# Altium PCB Tigershark 3D R1.8.PcbDoc (part 2 of 4)
Units mil, origin at the board's own origin, x right, y up, seen from the top; angles counter-clockwise.
Board outline 5500 x 4600 mil, 4 copper layers (Top Layer, Groun Plane, Power Plane, Bottom Layer), stack 61.73 mil thick; 307 components, 237 nets, 994 pads, 1215 vias.
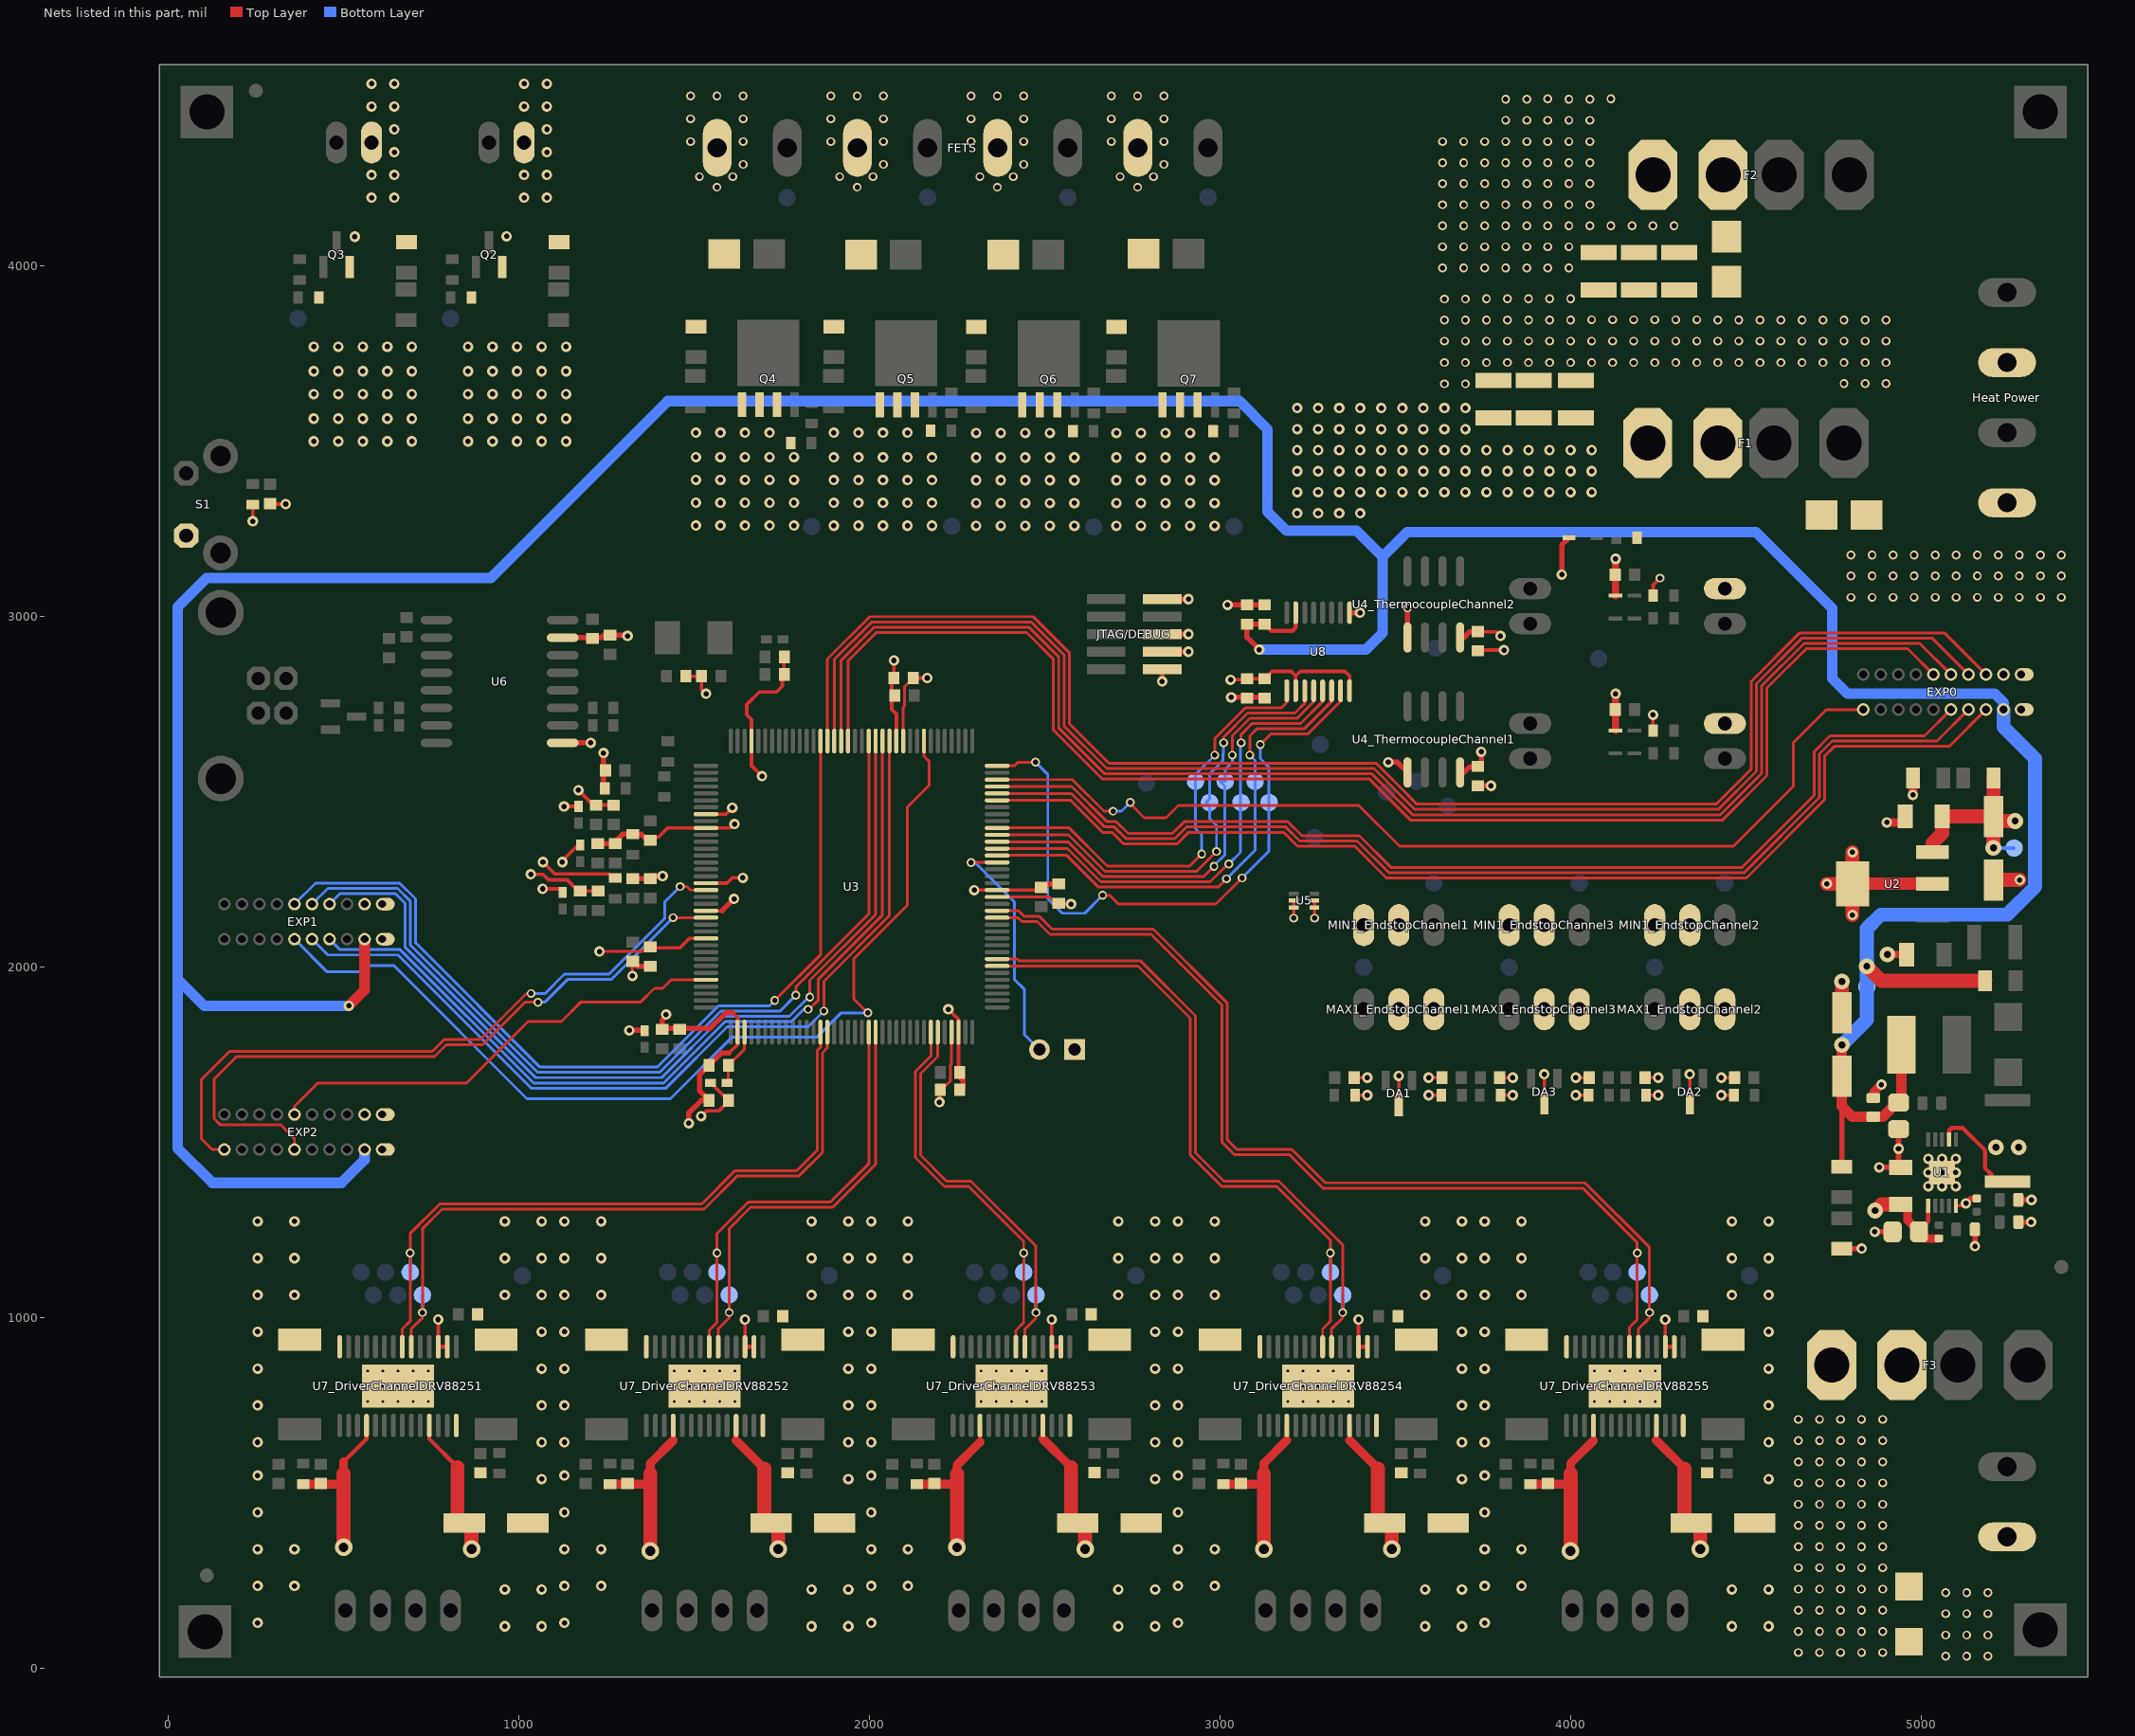
[diagram p4: the nets of this part, all layers, seen from the top]

## Part data
C1_EndstopChannel1 C1_EndstopChannel2 C1_EndstopChannel3 C2_EndstopChannel1 C2_EndstopChannel2 C2_EndstopChannel3 C3 C4 C5 C6 C7 C8 C12 C13 C14 C17 C20 C23 C25 C26 C27 C28 C32 C33 C36 C37 C38 C39 C41 C42 C43 C44 C45 C46 C47 C48 C53 C54 C55 C56 C57 C58 C59 C60 C61 C64 C65 C66_DriverChannelDRV88251 C66_DriverChannelDRV88252 C66_DriverChannelDRV88253 C66_DriverChannelDRV88254 C66_DriverChannelDRV88255 C68_DriverChannelDRV88251 C68_DriverChannelDRV88252 C68_DriverChannelDRV88253 C68_DriverChannelDRV88254 C68_DriverChannelDRV88255 C71_DriverChannelDRV88251 C71_DriverChannelDRV88252 C71_DriverChannelDRV88253 C71_DriverChannelDRV88254 C71_DriverChannelDRV88255 C73 C75_DriverChannelDRV88251 C75_DriverChannelDRV88252 C75_DriverChannelDRV88253 C75_DriverChannelDRV88254 C75_DriverChannelDRV88255: library part "Cap Semi", "Capacitor (Semiconductor SIM Model)"
C9: library part C1206C475K5PACTU, "CAP CER 1206 4.7uF 50V 10% X5R"
C10: library part GRM21BR71H105KA12L, "CAP CER 0805 1uF 50V 10% X7R"
C11 C40: library part C0603C104K5RACTU, "CAP CER 0603 100nF 50V 10% X7R"
C21: library part C0805C106K8PACTU, "CAP CER 0805 10uF 10V 10% X5R"
C22: library part GRM155R60J105KE19D, "CAP CER 0402 1uF 6.3V 10% X5R"
C24 C29: library part "Cap Pol3", "Polarized Capacitor (Surface Mount)"
C30_ThermistorChannel1 C30_ThermistorChannel2 C31_ThermocoupleChannel1 C31_ThermocoupleChannel2 C63: "Capacitor (Semiconductor SIM Model)"
C69_DriverChannelDRV88251 C69_DriverChannelDRV88252 C69_DriverChannelDRV88253 C69_DriverChannelDRV88254 C69_DriverChannelDRV88255: library part "Cap Pol1", "Polarized Capacitor (Radial)"
D1: library part "D Zener", "Zener Diode"
D2: library part SK310A, "DIODE Schottky 3A SMA"
D3_ThermistorChannel1 D3_ThermistorChannel2 D5_ThermistorChannel1 D5_ThermistorChannel2: "High Conductance Fast Diode"
D4 D6 D12 D15 D17 D19: library part "D Schottky", "Schottky Diode"
D7 D9: "Typical RED, GREEN, YELLOW, AMBER GaAs LED"
D8: "DIODE TVS 30V SMA"
D10 D11 D13 D14 D16 D18: "Typical RED GaAs LED"
DA1 DA2 DA3 DA4: "PESDxL2BT TVS Diode Array 2x"
F1 F2 F3 F4: library part "Fuse 1", "Fuse"
FETS: library part con-phoenix-508
"Heat Power": library part con-phoenix-508_4
JTAG/DEBUG: library part "ARM Cortex JTAG-DEBUG Header"
L1: "IND 15uH 3.9A 20%"
M1_DriverChannelDRV88251 M1_DriverChannelDRV88252 M1_DriverChannelDRV88253 M1_DriverChannelDRV88254 M1_DriverChannelDRV88255: library part "Molex 0705430003 Alt", "Molex 4 Pin Clip Connector"
MAX1_EndstopChannel1 MAX1_EndstopChannel2 MAX1_EndstopChannel3 MIN1_EndstopChannel1 MIN1_EndstopChannel2 MIN1_EndstopChannel3: library part "Molex Endstop"
"Motor Power": library part con-phoenix-508_2
P1: library part "Header 2", "Header, 2-Pin"
Q2 Q3 Q4 Q5 Q6 Q7: "N-Channel MOSFET"
R1 R8 R11 R14_ThermistorChannel1 R14_ThermistorChannel2 R19_ThermistorChannel1 R19_ThermistorChannel2 R21 R25: "Resistor"
R2_EndstopChannel1 R2_EndstopChannel2 R2_EndstopChannel3 R3_EndstopChannel1 R3_EndstopChannel2 R3_EndstopChannel3 R4 R5 R6 R13 R15 R16 R18 R20 R22 R23 R30_DriverChannelDRV88251 R30_DriverChannelDRV88252 R30_DriverChannelDRV88253 R30_DriverChannelDRV88254 R30_DriverChannelDRV88255 R31_DriverChannelDRV88251 R31_DriverChannelDRV88252 R31_DriverChannelDRV88253 R31_DriverChannelDRV88254 R31_DriverChannelDRV88255 R32_DriverChannelDRV88251 R32_DriverChannelDRV88252 R32_DriverChannelDRV88253 R32_DriverChannelDRV88254 R32_DriverChannelDRV88255 R33_DriverChannelDRV88251 R33_DriverChannelDRV88252 R33_DriverChannelDRV88253 R33_DriverChannelDRV88254 R33_DriverChannelDRV88255 R45 R46 R47 R52 R55 R56 R58 R59 R60 R62 R63 R64 R66 R67 R68 R70 R71: library part Res3, "Resistor"
R7 R10 R12: library part ERJ-3EKF1002V, "RES 0603 10K 100mW 1%"
R9: library part RL2512FK-070R06L, "RES 0.06 OHM 1W 1% 2512 SMD"
R17: library part CRCW0402200KFKED, "RES 0402 22r 63mW 1%"
S1: library part 1571610-2_1, "SWTCH Momentary Washable"
TP1 TP2 TP3 TP4 TP5 TP6 TP7 TP8 TP9_EndstopChannel1 TP9_EndstopChannel2 TP9_EndstopChannel3 TP10_EndstopChannel1 TP10_EndstopChannel2 TP10_EndstopChannel3 TP11 TP12 TP13 TP14 TP32_DriverChannelDRV88251 TP32_DriverChannelDRV88252 TP32_DriverChannelDRV88253 TP32_DriverChannelDRV88254 TP32_DriverChannelDRV88255 TP33_DriverChannelDRV88251 TP33_DriverChannelDRV88252 TP33_DriverChannelDRV88253 TP33_DriverChannelDRV88254 TP33_DriverChannelDRV88255 TP35_DriverChannelDRV88251 TP35_DriverChannelDRV88252 TP35_DriverChannelDRV88253 TP35_DriverChannelDRV88254 TP35_DriverChannelDRV88255 TP36_DriverChannelDRV88251 TP36_DriverChannelDRV88252 TP36_DriverChannelDRV88253 TP36_DriverChannelDRV88254 TP36_DriverChannelDRV88255 TP37_DriverChannelDRV88251 TP37_DriverChannelDRV88252 TP37_DriverChannelDRV88253 TP37_DriverChannelDRV88254 TP37_DriverChannelDRV88255 TP38 TP39_DriverChannelDRV88251 TP39_DriverChannelDRV88252 TP39_DriverChannelDRV88253 TP39_DriverChannelDRV88254 TP39_DriverChannelDRV88255 TP40_DriverChannelDRV88251 TP40_DriverChannelDRV88252 TP40_DriverChannelDRV88253 TP40_DriverChannelDRV88254 TP40_DriverChannelDRV88255 TP41 TP42 TP43 TP44 TP45 TP46 TP47 TP48 TP49 TP50 TP51 TP52_ThermistorChannel1 TP52_ThermistorChannel2: library part Socket, "Socket"
U1: library part LM25011, "REG BUCK"
U4_ThermocoupleChannel1 U4_ThermocoupleChannel2: "Cold Junction Compensated Thermocouple to Digital Converter, 14 Bits Temperature Resolution, -40 to 125 degC, 8-Pin SOIC (S8+4), Pb-Free"
U6: "USB Opto Isolator"
U7_DriverChannelDRV88251 U7_DriverChannelDRV88252 U7_DriverChannelDRV88253 U7_DriverChannelDRV88254 U7_DriverChannelDRV88255: "DRV8825 Ti Stepper Driver"
U8: library part TXB0106, "TXB0106 - Bidriectional Opendrain/pushpull level shift"
X2: library part XTAL, "Crystal Oscillator"

## Free pads (board coordinates)
  rect 150x150 hole 100: ""(105,105) ""(110,4440) ""(5340,110) ""(5340,4440)

## Via types
v1: diameter 25, hole 15, Top Layer to Bottom Layer, tented both sides, 594 vias
v2: diameter 30, hole 15, Top Layer to Bottom Layer, tented both sides, 518 vias
v3: diameter 19.68, hole 7.87, Top Layer to Bottom Layer, tented both sides, 75 vias
v4: diameter 50, hole 28, Top Layer to Bottom Layer, tented both sides, 10 vias
v5: diameter 45, hole 20, Top Layer to Bottom Layer, tented both sides, 9 vias
v6: diameter 30, hole 15, Top Layer to Bottom Layer, 9 vias

## Nets (pads, with @x,y where several pads share a name; then routed paths per layer and width w, separated by ;. In a path a pad name is that pad's centre, name@x,y a point inside that pad or via, vN(x,y) a via of type N, cw(c..) or ccw(c..) an arc to the next point about the centre after c; other vN are vias at no path point)
3.3VCC: C7.2 C25.2 C26.1 C29.1 C31_ThermocoupleChannel1.2 C31_ThermocoupleChannel2.2 C45.2 C46.2 C47.2 C48.2 C64.2 EXP0.12 EXP1.12 EXP2.12 FB5.1 FB6.1 FB7.1 FB8.1 FB9.1 JTAG/DEBUG.1 MAX1_EndstopChannel1.3 MAX1_EndstopChannel2.3 MAX1_EndstopChannel3.3 MIN1_EndstopChannel1.3 MIN1_EndstopChannel2.3 MIN1_EndstopChannel3.3 P1.1 R2_EndstopChannel1.1 R2_EndstopChannel2.1 R2_EndstopChannel3.1 R3_EndstopChannel1.1 R3_EndstopChannel2.1 R3_EndstopChannel3.1 R6.1 R11.2 R19_ThermistorChannel1.2 R19_ThermistorChannel2.2 R21.2 TP3.1 U2.3 U3.11 U3.62 U3.105 U3.125 U4_ThermocoupleChannel1.4 U4_ThermocoupleChannel2.4 U5.1 U5.2 U5.5 U5.6 U7_DriverChannelDRV88251.16 U7_DriverChannelDRV88251.17 U7_DriverChannelDRV88252.16 U7_DriverChannelDRV88252.17 U7_DriverChannelDRV88253.16 U7_DriverChannelDRV88253.17 U7_DriverChannelDRV88254.16 U7_DriverChannelDRV88254.17 U7_DriverChannelDRV88255.16 U7_DriverChannelDRV88255.17 U8.2 U8.8 | length 3817.7
  Top Layer w8: v2(1230,2045) 1348.38,2045 1349.19,2044.19 1362.35,2057.35 C48.2@1373.9,2045.81 ; FB9.1@1546.38,1670 FB9.1@1547.56,1670 ; C64.2@1597.56,1617.56 C64.2@1597.56,1620 ; U3.11@2096.54,2645.35 2096.54,2741.54 2100,2745 2100,2800 C47.2@2125,2825 ; C45.2@2210,1655 2231.55,1676.55 2231.55,1676.99 2230.81,1677.73 2230.81,1722.27 2234.33,1725.79 U3.105@2234.33,1814.65 ; U3.125@2364.25,2200.47 2513.43,2200.47 C46.2@2523.9,2190 ; JTAG/DEBUG.1@2834.92,2850 JTAG/DEBUG.1@2835,2849.92
  Top Layer w10: v2(241,3272) R21.2@241,3319.47 ; U7_DriverChannelDRV88251.17@770,917.36 v2(770,995) ; v2(1067.9,2223.62) FB5.1@1120.12,2223.62 ; v2(1068.9,2300) 1102.9,2266 1257.43,2266 R6.1@1268.9,2254.53 ; v2(1123.9,2300) 1123.9,2303.62 FB7.1@1168.9,2348.62 ; v2(1128.9,2458.62) FB8.1@1168.9,2458.62 ; C48.2@1373.9,2047.56 1373.9,2050 1379.46,2055.56 1459.6,2055.56 1486.4,2082.36 U3.62@1533.54,2082.36 ; v2(1520,1575) 1535,1590 1570,1590 C64.2@1597.56,1617.56 ; FB9.1@1547.56,1670 C64.2@1597.56,1620 ; U7_DriverChannelDRV88252.17@1645,917.36 v2(1645,995) ; C47.2@2125,2825 v2(2165,2825) ; v2(2200,1615) 2200,1645 C45.2@2210,1655 ; U7_DriverChannelDRV88253.17@2520,917.36 v2(2520,995) ; C46.2@2542.15,2184.19 2546.34,2180 v2(2575,2180) ; v2(3030,2820) C25.2@3067.44,2820 ; C25.2@3077,2822.56 C26.1@3127,2822.56 3148.44,2844 3203,2844 3216.02,2830.98 ; v1(3210,2140) 3210.47,2140.47 U5.6@3210.47,2170.32 U5.5@3210.47,2190 ; U8.2@3216.02,2788.78 3216.02,2830.98 ; U5.2@3269.53,2190 3270,2189.53 v1(3270,2140) ; U8.8@3369.57,2788.78 3369.57,2830.43 3356,2844 3229.05,2844 3216.02,2830.98 ; R3_EndstopChannel1.1@3385,1635 v2(3420,1635) ; U7_DriverChannelDRV88254.17@3395,917.36 v2(3395,995) ; v2(3595,1635) R2_EndstopChannel1.1@3630.95,1635 ; C31_ThermocoupleChannel2.2@3750,2957.05 3787.95,2957.05 v2(3800,2945) ; R3_EndstopChannel3.1@3800,1635 v2(3835,1635) ; v2(4015,1635) R2_EndstopChannel3.1@4050.95,1635 ; R3_EndstopChannel2.1@4215,1635 v2(4250,1635) ; v2(4235,2720) 4235,2675.47 R19_ThermistorChannel1.2@4235.47,2675 ; R19_ThermistorChannel2.2@4235.47,3060 4235.47,3090.47 v1(4255,3110) ; U7_DriverChannelDRV88255.17@4270,917.36 v2(4270,995) ; v2(4430,1635) R2_EndstopChannel2.1@4465.95,1635
  Top Layer w12: U7_DriverChannelDRV88251.17@770.16,917.2 U7_DriverChannelDRV88251.16@795.75,917.2 ; U7_DriverChannelDRV88252.17@1645.16,917.2 U7_DriverChannelDRV88252.16@1670.75,917.2 ; U7_DriverChannelDRV88253.17@2520.16,917.2 U7_DriverChannelDRV88253.16@2545.75,917.2 ; U7_DriverChannelDRV88254.17@3395.16,917.2 U7_DriverChannelDRV88254.16@3420.75,917.2 ; U7_DriverChannelDRV88255.17@4270.16,917.2 U7_DriverChannelDRV88255.16@4295.75,917.2
  Top Layer w15: v2(1315,1820) 1357.52,1820 FB6.1@1358.9,1818.62 ; v2(2835,2815) JTAG/DEBUG.1@2835,2849.92 ; U4_ThermocoupleChannel1.4@3685,2555.51 3696.02,2555.51 3712.56,2572.05 3745,2572.05 v2(3745,2614.49) ; U4_ThermocoupleChannel2.4@3685,2940.51 3696.02,2940.51 3712.56,2957.05 C31_ThermocoupleChannel2.2@3745,2957.05
  Top Layer w40: U2.3@5032.17,2328.55 5032.17,2354.17 5060.15,2382.15 C7.2@5060.15,2430 5206.55,2430 5206.55,2539.76 R11.2@5206.31,2540 ; v5(5206,2340) C29.1@5206,2428.55 ; C29.1@5219.55,2417 v5(5268,2417)
  Bottom Layer w10: v5(5206,2340) TP3.1@5265,2340
+5VCC: C11.1 C17.1 C20.1 C21.1 C24.1 EXP0.9 EXP1.9 EXP2.9 L1.2 R7.2 R8.2 R10.1 R25.1 TP1.1 U8.15 | length 12482.1
  Top Layer w12: C17.1@3127,2978.44 3146.44,2959 3206,2959 3216.02,2969.02 U8.15@3216.02,3011.22
  Top Layer w15: v2(3112,2906) 3077,2941 C20.1@3077,2978.44 C17.1@3127,2978.44 ; R8.2@4773.57,1430.62 4773.57,1508.31 4773.57,1603.31 ; R7.2@5153.35,1252.32 5153.57,1252.09 v2(5153.57,1204.31) ; R10.1@5277.34,1336.31 v2(5314.57,1336.31)
  Top Layer w30: v2(515,1890) 560,1935 EXP1.9@560,2080 ; v5(4773.57,1778.31) C24.1@4773.57,1688.76 4773.57,1603.31 4803.35,1573.54 C11.1@4863.57,1573.54 4891.31,1573.54 4931.48,1613.72 C21.1@4935.57,1613.72 ; C21.1@4943.83,1621.98 L1.2@4943.83,1779.31
  Top Layer w40: v5(4845,2003) 4887,1961 R25.1@5182.69,1961
  Bottom Layer w30: v2(515,1890) 102,1890 27,1965 ; EXP2.9@560,1480 560,1450 495,1385 125,1385 27,1483 27,1965 ; v2(3112,2906) 3416,2906 3464,2954 3464,3170.41 ; EXP0.9@5235,2735 5235,2755 5210,2780 4790,2780 4746,2824 4746,3024 4529,3241 3534.59,3241 3464,3170.41 ; 27,1965 27,3027.82 109.18,3110 920,3110 1425,3615 3055,3615 3135,3535 3135,3300 3190,3245 3389.41,3245 3464,3170.41
  Bottom Layer w40: v5(4773.57,1778.31) 4845,1849.74 4845,2110 4885,2150 5245,2150 5325,2230 5325,2595 5235,2685 EXP0.9@5235,2735
+12VCC1: C9.1 C10.1 C66_DriverChannelDRV88251.1 C66_DriverChannelDRV88252.1 C66_DriverChannelDRV88253.1 C66_DriverChannelDRV88254.1 C66_DriverChannelDRV88255.1 C69_DriverChannelDRV88251.1 C69_DriverChannelDRV88252.1 C69_DriverChannelDRV88253.1 C69_DriverChannelDRV88254.1 C69_DriverChannelDRV88255.1 D8.C F3.2 R17.2 R30_DriverChannelDRV88251.1 R30_DriverChannelDRV88252.1 R30_DriverChannelDRV88253.1 R30_DriverChannelDRV88254.1 R30_DriverChannelDRV88255.1 U1.1 U7_DriverChannelDRV88251.4 U7_DriverChannelDRV88251.11 U7_DriverChannelDRV88252.4 U7_DriverChannelDRV88252.11 U7_DriverChannelDRV88253.4 U7_DriverChannelDRV88253.11 U7_DriverChannelDRV88254.4 U7_DriverChannelDRV88254.11 U7_DriverChannelDRV88255.4 U7_DriverChannelDRV88255.11 | length 4662.8
  Top Layer w12: 500,589 565.43,654.43 U7_DriverChannelDRV88251.4@565.43,692.8 ; U7_DriverChannelDRV88251.11@744.57,692.8 744.57,654.43 825,574 ; 1440.43,650.43 U7_DriverChannelDRV88252.4@1440.43,692.8 ; 1619.57,650.43 U7_DriverChannelDRV88252.11@1619.57,692.8 ; 2315.43,645.43 U7_DriverChannelDRV88253.4@2315.43,692.8 ; 2494.57,654.43 U7_DriverChannelDRV88253.11@2494.57,692.8 ; 3190.43,650.43 U7_DriverChannelDRV88254.4@3190.43,692.8 ; 3369.57,650.43 U7_DriverChannelDRV88254.11@3369.57,692.8 ; 4065.43,650.43 U7_DriverChannelDRV88255.4@4065.43,692.8 ; 4244.57,650.43 U7_DriverChannelDRV88255.11@4244.57,692.8 ; C10.1@5011.05,1266.68 5020.2,1275.83 U1.1@5020.2,1319.83
  Top Layer w24: C9.1@4961.57,1303.15 4961.57,1277.72 C10.1@4993.98,1245.31 ; C10.1@5012.98,1226.31 R17.2@5050.57,1226.31
  Top Layer w25: R30_DriverChannelDRV88251.1@385,525.47 500,525.47 ; 500,555 500,589 ; R30_DriverChannelDRV88252.1@1260,525.47 1375,525.47 ; 1375,555 1375,585 1440.43,650.43 ; 1619.57,650.43 1700,570 ; R30_DriverChannelDRV88253.1@2135,525.47 2250,525.47 ; 2250,555 2250,580 2315.43,645.43 ; 2494.57,654.43 2575,574 ; R30_DriverChannelDRV88254.1@3010,525.47 3125,525.47 ; 3125,555 3125,585 3190.43,650.43 ; 3369.57,650.43 3450,570 ; R30_DriverChannelDRV88255.1@3885,525.47 4000,525.47 ; 4000,555 4000,585 4065.43,650.43 ; 4244.57,650.43 4325,570
  Top Layer w40: v4(500,345) 500,555 ; C69_DriverChannelDRV88251.1@825,415.55 825,574 ; v4(865,340) C69_DriverChannelDRV88251.1@865,415 ; v4(1375,335) 1375,555 ; C69_DriverChannelDRV88252.1@1700,415.55 1700,570 ; v4(1740,340) C69_DriverChannelDRV88252.1@1740,420 ; v4(2250,345) 2250,555 ; C69_DriverChannelDRV88253.1@2575,415.55 2575,574 ; v4(2615,340) C69_DriverChannelDRV88253.1@2615,420 ; v4(3125,340) 3125,555 ; C69_DriverChannelDRV88254.1@3450,415.55 3450,570 ; v4(3490,340) C69_DriverChannelDRV88254.1@3490,420 ; v4(4000,335) 4000,555 ; C69_DriverChannelDRV88255.1@4325,415.55 4325,570 ; v4(4370,340) C69_DriverChannelDRV88255.1@4370,415 ; v5(4869,1306) 4886.17,1323.17 C9.1@4941.57,1323.17
  other v1: 4650,45 4710,45 4770,45 4830,45 4890,45 4650,105 4710,105 4770,105 4830,105 4890,105 4650,166 4710,166 4770,166 4830,166 4890,166 4650,226 4710,226 4770,226 4830,226 4890,226 4650,287 4710,287 4770,287 4830,287 4890,287 4650,347 4710,347 4770,347 4830,347 4890,347 4650,408 4710,408 4770,408 4830,408 4890,408 4650,468 4710,468 4770,468 4830,468 4890,468 4650,529 4710,529 4770,529 4830,529 4890,529 4650,589 4710,589 4770,589 4830,589 4890,589 4650,650 4710,650 4770,650 4830,650 4890,650 4650,710 4710,710 4770,710 4830,710 4890,710
+12VCC2: C8.2 C12.2 C14.2 D6.2 D12.2 D15.2 D17.2 F1.2 FAN-1.1 FAN-2.1 FETS.1 FETS.3 FETS.5 R1.2 R13.1 R47.1 R56.2 R60.2 R64.2
  other v1: 1565,4225 1965,4225 2365,4225 1515,4255 1610,4255 1915,4255 2010,4255 2315,4255 2410,4255 1640,4290 2040,4290 2440,4290 1490,4355 1640,4355 1890,4355 2040,4355 2290,4355 2440,4355 1490,4420 1640,4420 1890,4420 2040,4420 2290,4420 2440,4420 1490,4485 1565,4485 1640,4485 1890,4485 1965,4485 2040,4485 2290,4485 2365,4485 2440,4485
  other v2: 3220,3295 3280,3295 3340,3295 3400,3295 3220,3355 3280,3355 3340,3355 3400,3355 3460,3355 3520,3355 3580,3355 3640,3355 3700,3355 3760,3355 3820,3355 3880,3355 3940,3355 4000,3355 4060,3355 3220,3415 3280,3415 3340,3415 3400,3415 3460,3415 3520,3415 3580,3415 3640,3415 3700,3415 3760,3415 3820,3415 3880,3415 3940,3415 4000,3415 4060,3415 3220,3475 3280,3475 3340,3475 3400,3475 3460,3475 3520,3475 3580,3475 3640,3475 3700,3475 3760,3475 3820,3475 3880,3475 3940,3475 4000,3475 4060,3475 3220,3535 3280,3535 3340,3535 3400,3535 3460,3535 3520,3535 3580,3535 3640,3535 3700,3535 3220,3595 3280,3595 3340,3595 3400,3595 3460,3595 3520,3595 3580,3595 3640,3595 3700,3595 580,4195 645,4195 1015,4195 1080,4195 580,4260 645,4260 1015,4260 1080,4260 645,4325 1080,4325 645,4390 1080,4390 580,4455 645,4455 1015,4455 1080,4455 580,4520 645,4520 1015,4520 1080,4520
+12VCC3: C3.2 C5.2 C6.2 D4.2 D19.2 F2.2 FETS.7 R68.2
  other v1: 3635,3995 3695,3995 3755,3995 3815,3995 3875,3995 3935,3995 3995,3995 3635,4055 3695,4055 3755,4055 3815,4055 3875,4055 3935,4055 3995,4055 3635,4115 3695,4115 3755,4115 3815,4115 3875,4115 3935,4115 3995,4115 4055,4115 4115,4115 4175,4115 4235,4115 4295,4115 3635,4175 3695,4175 3755,4175 3815,4175 3875,4175 3935,4175 3995,4175 4055,4175 2765,4225 3635,4235 3695,4235 3755,4235 3815,4235 3875,4235 3935,4235 3995,4235 4055,4235 2715,4255 2810,4255 2840,4290 3635,4295 3695,4295 3755,4295 3815,4295 3875,4295 3935,4295 3995,4295 4055,4295 2690,4355 2840,4355 3635,4355 3695,4355 3755,4355 3815,4355 3875,4355 3935,4355 3995,4355 4055,4355 3815,4416 3875,4416 3935,4416 3995,4416 4055,4416 2690,4420 2840,4420 3815,4476 3875,4476 3995,4476 4055,4476 3935,4477 4115,4477 2690,4485 2765,4485 2840,4485
AN_EXP0: EXP1.7 U3.14 | length 2477.1
  Top Layer w8: v1(1825,1880) 1828.23,1880 1853.5,1905.27 1853.5,1964.71 2036,2147.21 2036,2643.87 U3.14@2037.48,2645.35
  Bottom Layer w8: EXP1.7@460,2080 490,2050 661.51,2050 1041.51,1670 1413.49,1670 1588.49,1845 1777.98,1845 1812.98,1880 v1(1825,1880)
AN_EXP1: EXP1.14 U3.15 | length 2576.5
  Top Layer w8: v1(1830,1915) 1830,1962.43 2017.8,2150.22 U3.15@2017.8,2645.35
  Bottom Layer w8: EXP1.14@460,2180 490,2210 647.72,2210 675,2182.72 675,2057.72 1047.72,1685 1407.28,1685 1582.28,1860 1771.77,1860 1826.77,1915 v1(1830,1915)
AVREF: C65.2 FB9.2 U3.75 | length 165.4
  Top Layer w8: FB9.2@1593.62,1670 1597.56,1673.94 C65.2@1597.56,1720 1643.78,1766.22 U3.75@1643.78,1814.65
BED_PWM: TP38.1 U3.144 U8.7 | length 1884.6
  Top Layer w8: U3.144@2364.25,2574.49 2413.39,2574.49 2423.9,2585 v1(2473.9,2585) ; v1(2665,2205) 2685,2205 2710,2180 2988.14,2180 v1(3062.78,2254.64) ; v1(3115,2635) 3145,2665 3250,2665 3343.98,2758.98 U8.7@3343.98,2788.78
  Bottom Layer w8: v1(2473.9,2585) 2508.9,2550 2508.9,2195 2549.9,2154 2614,2154 v1(2665,2205) ; v1(3062.78,2254.64) 3140,2331.86 3140,2570 3115,2595 v1(3115,2635)
DIR1: TP39_DriverChannelDRV88251.1 U3.87 U7_DriverChannelDRV88251.20 | length 1964.8
  Top Layer w8: U7_DriverChannelDRV88251.20@693.39,917.2 693.39,968.39 725,1000 ; v1(725,1015) 725,1253.93 781.07,1310 1528.35,1310 1623.35,1405 1799.3,1405 1865.94,1471.64 1865.94,1755.94 1880,1770 U3.87@1880,1814.65
  Bottom Layer w8: v1(725,1015) TP39_DriverChannelDRV88251.1@725,1065
DIR2: TP39_DriverChannelDRV88252.1 U3.94 U7_DriverChannelDRV88252.20 | length 1270.6
  Top Layer w8: U7_DriverChannelDRV88252.20@1568.39,917.2 1568.39,968.17 1600,999.79 v1(1600,1015) 1600,1253.93 1661.07,1315 1895,1315 2017.8,1437.8 U3.94@2017.8,1814.65
  Bottom Layer w8: v1(1600,1015) TP39_DriverChannelDRV88252.1@1600,1065
DIR3: TP39_DriverChannelDRV88253.1 U3.103 U7_DriverChannelDRV88253.20 | length 1158.3
  Top Layer w8: U3.103@2194.96,1814.65 2194.96,1744.96 2146.22,1696.22 2146.22,1463.78 2220,1390 2289.4,1390 2475,1204.4 v1(2475,1015) 2475,998.79 2446.21,970 2445,970 2443.39,968.39 U7_DriverChannelDRV88253.20@2443.39,917.2
  Bottom Layer w8: v1(2475,1015) TP39_DriverChannelDRV88253.1@2475,1065
DIR4: TP39_DriverChannelDRV88254.1 U3.116 U7_DriverChannelDRV88254.20 | length 1905.6
  Top Layer w8: U3.116@2364.25,2023.31 2421.69,2023.31 2426.38,2018.62 2772.44,2018.62 2930,1861.07 2930,1471.07 3011.07,1390 3167.72,1390 3350,1207.72 v1(3350,1015) 3350,1000 3318.39,968.39 U7_DriverChannelDRV88254.20@3318.39,917.2
  Bottom Layer w8: v1(3350,1015) TP39_DriverChannelDRV88254.1@3350,1065
DIR5: TP39_DriverChannelDRV88255.1 U3.123 U7_DriverChannelDRV88255.20 | length 2833.8
  Top Layer w8: U3.123@2364.25,2161.1 2425.11,2161.1 2441.21,2145 2484.84,2145 2521.21,2108.62 2809.72,2108.62 3020,1898.35 3020,1508.35 3048.35,1480 3205,1480 3300,1385 4041.07,1385 4225,1201.07 v1(4225,1015) 4225,1000 4193.39,968.39 U7_DriverChannelDRV88255.20@4193.39,917.2
  Bottom Layer w8: v1(4225,1015) TP39_DriverChannelDRV88255.1@4225,1065
DIR_EXP1: EXP1.6 U3.13 | length 2575
  Top Layer w8: v1(1870,1875) 1870,1960 2057.17,2147.17 U3.13@2057.17,2645.35
  Bottom Layer w8: EXP1.6@410,2080 455,2035 655.29,2035 1035.29,1655 1419.71,1655 1594.71,1830 1825,1830 v1(1870,1875)
DIR_EXP2: EXP1.15 U3.16 | length 2592
  Top Layer w8: v1(1790,1920) 1790,1943.64 1998.11,2151.75 U3.16@1998.11,2645.35
  Bottom Layer w8: EXP1.15@410,2180 455,2225 653.93,2225 690,2188.93 690,2063.93 1053.93,1700 1401.07,1700 1576.07,1875 1745,1875 v1(1790,1920)
EN1: TP32_DriverChannelDRV88251.1 U3.86 U7_DriverChannelDRV88251.21 | length 1987.2
  Top Layer w8: U7_DriverChannelDRV88251.21@667.8,917.2 667.8,967.8 690,990 v1(690,1185) 690,1240.15 774.85,1325 1522.13,1325 1617.13,1420 1793.09,1420 1850.94,1477.86 1850.94,1762.16 1860.32,1771.53 U3.86@1860.32,1814.65
  Bottom Layer w8: TP32_DriverChannelDRV88251.1@690,1130 v1(690,1185)
EN2: TP32_DriverChannelDRV88252.1 U3.93 U7_DriverChannelDRV88252.21 | length 1278.1
  Top Layer w8: U7_DriverChannelDRV88252.21@1542.8,917.2 1542.8,963.8 1565,986 v1(1565,1185) 1565,1240.15 1654.85,1330 1888.79,1330 1998.11,1439.32 U3.93@1998.11,1814.65
  Bottom Layer w8: TP32_DriverChannelDRV88252.1@1565,1130 v1(1565,1185)
EN3: TP32_DriverChannelDRV88253.1 U3.102 U7_DriverChannelDRV88253.21 | length 1148.4
  Top Layer w8: U3.102@2175.28,1814.65 2175.28,1746.49 2131.22,1702.43 2131.22,1457.57 2213.79,1375 2283.18,1375 2440,1218.18 v1(2440,1185) 2440,986.21 2417.8,964.01 U7_DriverChannelDRV88253.21@2417.8,917.2
  Bottom Layer w8: TP32_DriverChannelDRV88253.1@2440,1130 v1(2440,1185)
EN4: TP32_DriverChannelDRV88254.1 U3.115 U7_DriverChannelDRV88254.21 | length 1871.7
  Top Layer w8: U3.115@2364.25,2003.62 2766.23,2003.62 2915,1854.85 2915,1464.85 3004.85,1375 3161.51,1375 3315,1221.51 v1(3315,1185) 3315,990 3292.8,967.8 U7_DriverChannelDRV88254.21@3292.8,917.2
  Bottom Layer w8: TP32_DriverChannelDRV88254.1@3315,1130 v1(3315,1185)
EN5: TP32_DriverChannelDRV88255.1 U3.122 U7_DriverChannelDRV88255.21 | length 2799.8
  Top Layer w8: U3.122@2364.25,2141.42 2423.58,2141.42 2435,2130 2478.62,2130 2515,2093.62 2803.51,2093.62 3005,1892.13 3005,1502.13 3042.13,1465 3198.79,1465 3293.79,1370 4034.85,1370 4190,1214.85 v1(4190,1185) 4190,995 4167.8,972.8 U7_DriverChannelDRV88255.21@4167.8,917.2
  Bottom Layer w8: TP32_DriverChannelDRV88255.1@4190,1130 v1(4190,1185)
EN_EXP1: EXP1.5 U3.8 | length 2826.6
  Top Layer w8: v1(1995,1870) 1955.61,1909.39 1955.61,2024.39 2107.75,2176.54 2107.75,2455.94 2169.9,2518.08 2169.9,2587.68 2155.59,2601.98 U3.8@2155.59,2645.35
  Bottom Layer w8: EXP1.5@360,2080 453.5,1986.5 552.71,1986.5 571.21,2005 642.87,2005 1022.87,1625 1432.13,1625 1607.13,1800 1849.45,1800 1919.45,1870 v1(1995,1870)
EN_EXP2: EXP1.16 U3.23 | length 2558.6
  Top Layer w8: v1(1730,1905) 1860.32,2035.32 U3.23@1860.32,2645.35
  Bottom Layer w8: EXP1.16@360,2180 420,2240 660.15,2240 705,2195.15 705,2070.15 1060.15,1715 1394.85,1715 1569.85,1890 1715,1890 v1(1730,1905)
ERASE: P1.2 U3.130 | length 695.4
  Top Layer w8: v1(2290,2298.9) U3.130@2364.25,2298.9
  Bottom Layer w8: v1(2290,2298.9) 2301.1,2298.9 2413.9,2186.1 2413.9,1965 2441.4,1937.5 2441.4,1808.6 P1.2@2485,1765
EXP_CS: EXP0.1 U3.142 | length 2835.7
  Top Layer w8: U3.142@2364.25,2535.12 2578.67,2535.12 2668.79,2445 v1(2695,2445) ; v1(2743.9,2470) 2743.9,2466.77 2784.16,2426.5 2845.95,2426.5 2880.95,2461.5 3395.55,2461.5 3512.05,2345 4464.71,2345 4635,2515.29 4635,2640 4730,2735 EXP0.1@4835,2735
  Bottom Layer w8: v1(2695,2445) 2718.9,2445 v1(2743.9,2470)
EXP_CS2: EXP2.1 U3.55 | length 1945.6
  Top Layer w8: EXP2.1@160,1480 125,1480 95,1510 95,1680 175,1760 753.23,1760 786.98,1793.75 890.26,1793.75 1021.51,1925 v1(1035,1925) ; v1(1460,2230) 1480,2230 1489.84,2220.16 U3.55@1533.54,2220.16
  Bottom Layer w8: v1(1035,1925) 1075,1925 1130,1980 1257.37,1980 1416.5,2139.13 1416.5,2186.5 v1(1460,2230)
EXP_INTERRUP1: EXP0.16 U3.19 | length 4078.2
  Top Layer w8: U3.19@1939.06,2645.35 1939.06,2874.35 2019.71,2955 2448.64,2955 2525,2878.64 2525,2676.36 2664.86,2536.5 3426.85,2536.5 3467.19,2496.16 3467.19,2495.93 3543.12,2420 4433.64,2420 4560,2546.36 4560,2796.36 4672.64,2909 4961,2909 EXP0.16@5035,2835
EXP_INTERRUP2: EXP0.15 U3.20 | length 4161.2
  Top Layer w8: U3.20@1919.37,2645.35 1919.37,2875.88 2013.49,2970 2454.85,2970 2540,2884.85 2540,2682.57 2671.07,2551.5 3433.06,2551.5 3482.19,2502.37 3482.19,2502.14 3549.33,2435 4427.43,2435 4545,2552.57 4545,2802.57 4666.43,2924 4996,2924 EXP0.15@5085,2835
EXP_SYNC: EXP0.6 U3.141 | length 3103.4
  Top Layer w8: U3.141@2364.25,2515.43 2577.14,2515.43 2677.57,2415 2704.45,2415 2737.95,2381.5 2864.59,2381.5 2898.09,2415 3193.79,2415 3233.79,2375 3397.2,2375 3487.2,2285 4489.56,2285 4695,2490.44 4695,2615.15 4739.85,2660 5010,2660 EXP0.6@5085,2735
FET_PWM1: TP43.1 U3.135 U8.1 | length 1283.7
  Top Layer w8: U3.135@2364.25,2397.32 2569.44,2397.32 2678.27,2288.5 2913.14,2288.5 v1(2947.57,2322.93) ; v1(2985,2605) 2985,2652.43 3072.57,2740 3175,2740 3190.43,2755.43 U8.1@3190.43,2788.78
  Bottom Layer w8: v1(2947.57,2322.93) 2947.57,2377.43 2930,2395 2930,2550 v1(2985,2605)
FET_PWM2: TP44.1 U3.134 U8.3 | length 1359.2
  Top Layer w8: U3.134@2364.25,2377.64 2567.91,2377.64 2672.05,2273.5 2933.5,2273.5 v1(2990,2330) ; v1(3010,2640) 3010,2656.21 3078.79,2725 3213.79,2725 3241.61,2752.83 U8.3@3241.61,2788.78
  Bottom Layer w8: v1(2990,2330) 2990,2405 2970,2425 2970,2460 2960,2470 2970,2480 2970,2550.91 3008.5,2589.41 3008.5,2608.5 3010,2610 v1(3010,2640)
FET_PWM3: TP45.1 U3.133 U8.4 | length 1384.9
  Top Layer w8: U3.133@2364.25,2357.95 2566.39,2357.95 2665.84,2258.5 2953.86,2258.5 v1(2982.93,2287.57) ; v1(3035,2605) 3035,2660 3085,2710 3220,2710 3267.2,2757.2 U8.4@3267.2,2788.78
  Bottom Layer w8: v1(2982.93,2287.57) 2982.93,2289.69 3013.5,2320.27 3013.5,2516.5 TP45.1@3000,2530 ; TP45.1@3005,2530 TP45.1@3015,2530 3015,2565 3035,2585 v1(3035,2605)
FET_PWM4: TP46.1 U3.132 U8.5 | length 1407.8
  Top Layer w8: U3.132@2364.25,2338.27 2564.86,2338.27 2659.63,2243.5 2972.09,2243.5 3023.23,2294.64 v1(3025.36,2294.64) ; v1(3060,2640) 3060,2663.79 3091.21,2695 3230,2695 3292.8,2757.8 U8.5@3292.8,2788.78
  Bottom Layer w8: v1(3025.36,2294.64) 3058.5,2327.79 3058.5,2638.5 v1(3060,2640)
FET_PWM5: TP47.1 U3.131 U8.6 | length 1455.5
  Top Layer w8: U3.131@2364.25,2318.58 2364.25,2320 2561.91,2320 2653.41,2228.5 2994.57,2228.5 v1(3018.28,2252.22) ; v1(3085,2605) 3085,2660 3105,2680 3240,2680 3318.39,2758.39 U8.6@3318.39,2788.78
  Bottom Layer w8: v1(3018.28,2252.22) 3100,2333.93 3100,2590 v1(3085,2605)
GND: "Heat Power.2" "Heat Power.4" "Motor Power.2" C1_EndstopChannel1.2 C1_EndstopChannel2.2 C1_EndstopChannel3.2 C2_EndstopChannel1.2 C2_EndstopChannel2.2 C2_EndstopChannel3.2 C3.1 C4.1 C5.1 C6.1 C7.1 C8.1 C9.2 C10.2 C11.2 C12.1 C13.1 C14.1 C17.2 C20.2 C21.2 C22.2 C23.1 C24.2 C25.1 C26.2 C27.1 C28.1 C29.2 C30_ThermistorChannel1.1 C30_ThermistorChannel2.1 C31_ThermocoupleChannel1.1 C31_ThermocoupleChannel2.1 C32.1 C33.1 C36.1 C37.1 C38.1 C39.1 C41.1 C42.1 C43.1 C44.1 C45.1 C46.1 C47.1 C48.1 C53.1 C54.1 C55.1 C56.1 C57.1 C60.1 C61.1 C63.1 C64.1 C65.1 C69_DriverChannelDRV88251.2 C69_DriverChannelDRV88252.2 C69_DriverChannelDRV88253.2 C69_DriverChannelDRV88254.2 C69_DriverChannelDRV88255.2 C71_DriverChannelDRV88251.1 C71_DriverChannelDRV88252.1 C71_DriverChannelDRV88253.1 C71_DriverChannelDRV88254.1 C71_DriverChannelDRV88255.1 C73.1 C75_DriverChannelDRV88251.1 C75_DriverChannelDRV88252.1 C75_DriverChannelDRV88253.1 C75_DriverChannelDRV88254.1 C75_DriverChannelDRV88255.1 D1.1 D4.1 D5_ThermistorChannel1.1 D5_ThermistorChannel2.1 D6.1 D7.1 D8.A D9.1 DA1.3 DA2.3 DA3.3 EXP0.10 EXP0.11 EXP1.10 EXP1.11 EXP2.10 EXP2.11 JTAG/DEBUG.3 JTAG/DEBUG.5 JTAG/DEBUG.9 MAX1_EndstopChannel1.2 MAX1_EndstopChannel2.2 MAX1_EndstopChannel3.2 MIN1_EndstopChannel1.2 MIN1_EndstopChannel2.2 MIN1_EndstopChannel3.2 P2_ThermistorChannel1.2 P2_ThermistorChannel2.2 Q2.2 Q3.2 Q4.1 Q4.2 Q4.3 Q5.1 Q5.2 Q5.3 Q6.1 Q6.2 Q6.3 Q7.1 Q7.2 Q7.3 R4.2 R9.1 R12.2 R23.1 R32_DriverChannelDRV88251.1 R32_DriverChannelDRV88252.1 R32_DriverChannelDRV88253.1 R32_DriverChannelDRV88254.1 R32_DriverChannelDRV88255.1 R33_DriverChannelDRV88251.1 R33_DriverChannelDRV88252.1 R33_DriverChannelDRV88253.1 R33_DriverChannelDRV88254.1 R33_DriverChannelDRV88255.1 R46.2 R55.2 R59.2 R63.2 R67.2 R71.2 S1.2 U1.5 U1.7 U1.11 U2.2 U2.4 U3.12 U3.33 U3.44 U3.46 U3.54 U3.58 U3.74 U3.106 U3.126 U4_ThermocoupleChannel1.1 U4_ThermocoupleChannel2.1 U6.9 U6.15 U7_DriverChannelDRV88251.14 U7_DriverChannelDRV88251.28 U7_DriverChannelDRV88251.29 U7_DriverChannelDRV88252.14 U7_DriverChannelDRV88252.28 U7_DriverChannelDRV88252.29 U7_DriverChannelDRV88253.14 U7_DriverChannelDRV88253.28 U7_DriverChannelDRV88253.29 U7_DriverChannelDRV88254.14 U7_DriverChannelDRV88254.28 U7_DriverChannelDRV88254.29 U7_DriverChannelDRV88255.14 U7_DriverChannelDRV88255.28 U7_DriverChannelDRV88255.29 U8.9 | length 6528.6
  Top Layer w10: C63.1@290,3322.44 291.44,3321 v2(335,3321) ; v2(1033.9,2265) 1068.9,2265 1084.9,2249 1137.46,2249 1168.9,2217.56 C54.1@1220.12,2217.56 ; v2(1170,2505) 1212.44,2462.56 C60.1@1268.9,2462.56 ; v2(1323.9,1975) C42.1@1323.9,2017.44 ; C41.1@1358.9,2370 1397.13,2370 1424.45,2397.32 U3.46@1533.54,2397.32 1603.74,2397.32 v2(1615,2408.58) ; v2@1420,1860 v2(1420,1865) ; C43.1@1476.46,2830 C44.1@1521.34,2830 1521.34,2792.56 v2(1533.9,2780) ; U3.58@1533.54,2161.1 1580,2161.1 ; U3.54@1533.54,2239.84 1593.74,2239.84 1608.9,2255 v2(1638.9,2255) ; U3.44@1533.54,2436.69 1590.59,2436.69 v2(1608.9,2455) ; 1599.61,1755 1624.09,1779.48 U3.74@1624.09,1814.65 1624.09,1855.91 1610,1870 ; v2(1693.62,2545) 1663.46,2575.16 U3.33@1663.46,2645.35 1663.46,2706.89 1650,2720.35 1650,2749.3 1685.7,2785 1735,2785 1751.46,2801.46 1751.46,2835 1756.09,2839.63 1756.09,2855 1756.46,2855.37 C32.1@1756.46,2870 ; v2(2070,2875) 2070,2831.22 2063.78,2825 2063.78,2735.12 2076.85,2722.05 U3.12@2076.85,2645.35 ; v2(2225,1880) 2254.02,1850.98 U3.106@2254.02,1814.65 C23.1@2254.02,1690.13 ; v2@2294.05,2220.16 U3.126@2364.25,2220.16 C39.1@2494.05,2220.16 ; C2_EndstopChannel1.2@3382.56,1685 v2(3420,1685) ; DA1.3@3510,1602.6 v2(3510,1690) ; v2(3595,1685) C1_EndstopChannel1.2@3632.91,1685 ; C31_ThermocoupleChannel2.1@3752.56,2904.49 v2(3810,2904.49) ; C2_EndstopChannel3.2@3797.56,1685 v2(3835,1685) ; DA3.3@3925,1607.6 v2(3925,1695) ; v2(4015,1685) C1_EndstopChannel3.2@4052.91,1685 ; C2_EndstopChannel2.2@4212.56,1685 v2(4250,1685) ; DA2.3@4340,1607.6 v2(4340,1695) ; v2(4430,1685) C1_EndstopChannel2.2@4467.91,1685 ; U1.5@5098.94,1319.83 v2@5121.09,1319.83
  Top Layer w12: U1.7@5079.26,1508.8 5079.26,1533.49 5087.65,1541.88 5118.13,1541.88 5182.59,1477.42 5182.59,1426.36 5201,1407.95
  Top Layer w15: U6.9@1125.12,2640 v2(1205,2640) ; U6.15@1125.12,2940 1235,2940 1242.56,2947.56 C56.1@1260,2947.56 v2@1307.44,2947.56 ; C28.1@1218.9,2352.56 1268.9,2352.56 1295.87,2379.53 1349.37,2379.53 C41.1@1358.9,2370 ; R23.1@1241.34,2511.97 v2(1241.34,2611.22) ; C37.1@1318.9,2252.56 1368.9,2252.56 1376.34,2260 v2(1410,2260) ; C42.1@1323.9,2017.44 1338.9,2002.44 C48.1@1375,2002.44 ; C27.1@1408.9,1822.56 1408.9,1848.9 v2@1420,1860 ; C27.1@1421.46,1825 1545,1825 1590,1870 1610,1870 ; v2(1485,1555) 1485,1585 1520,1620 C64.1@1542.44,1620 1515,1647.44 1515,1692.56 C65.1@1542.44,1720 1577.44,1755 1599.61,1755 ; 1580,2161.1 v2(1613.9,2195) ; C23.1@2254.02,1690.13 2266.97,1677.18 C45.1@2266.97,1655 ; C39.1@2494.05,2220.16 2511.46,2237.56 C46.1@2543.9,2237.56 ; JTAG/DEBUG.3@2834.92,2900 v2(2910,2900) ; JTAG/DEBUG.5@2834.92,2950 v2(2910,2950) ; JTAG/DEBUG.9@2834.92,3050 v2(2910,3050) ; v2(3021.44,3033.56) C20.2@3077,3033.56 C17.2@3127,3033.56 ; v2(3032,2770) C26.2@3124.44,2770 ; U8.9@3369.57,3011.22 3398.78,3011.22 v2(3399,3011) ; v2(3480,2584.49) 3506.02,2584.49 U4_ThermocoupleChannel1.1@3535,2555.51 ; U4_ThermocoupleChannel2.1@3535,2940.51 v1(3535,3025) ; C31_ThermocoupleChannel1.1@3735,2517.44 v2(3772.95,2517.44) ; v2(3975,3120) 3975,3204.37 D1.1@3995.63,3225 ; D7.1@4773.46,1197.31 v2(4830.57,1197.31) ; v2(4867.57,1245.31) C10.2@4918.57,1245.31 ; v2(4880.57,1429.31) 4880.72,1429.46 C9.2@4941.57,1429.46 ; C9.2@4935.57,1435.46 v2(4935.57,1482.31) C21.2@4935.57,1538.31 ; v2@5121.09,1319.83 5141.57,1340.31 C22.2@5158.57,1340.31 ; R12.2@5277.35,1273.32 v2(5313.57,1273.31)
  Top Layer w20: D5_ThermistorChannel1.1@4128.43,2675 v2(4128.43,2780) ; D5_ThermistorChannel2.1@4128.43,3060 v2(4128.43,3165) ; v5(4904,2036) C4.1@4958.85,2036
  Top Layer w25: C11.2@4863.57,1627.09 4863.57,1642.31 v2(4886.57,1665.31) ; v2(4902,2413) C7.1@4936.85,2413 ; v2(4976.61,2491.61) D9.1@4976.61,2539.5
  Top Layer w35: U2.4@4804,2238 U2.2@5032.17,2238
  Top Layer w40: v2(4731,2238) U2.4@4803.83,2238 ; C24.2@4773.57,1869.87 4774,1870.29 v5(4774,1959) ; v2@4803.83,2149.17 U2.4@4803.83,2238 ; v2(4804,2328) 4804,2238 U2.4@4803.83,2238 ; C29.2@5207.55,2249 v2(5281,2249)
  other v1: 5070,35 5130,35 5190,35 5070,95 5130,95 5190,95 5070,156 5130,156 5190,156 5070,216 5130,216 5190,216 4800,3055 4860,3055 4920,3055 4980,3055 5040,3055 5100,3055 5160,3055 5220,3055 5280,3055 5340,3055 5400,3055 4800,3116 4860,3116 4920,3116 4980,3116 5040,3116 5100,3116 5160,3116 5220,3116 5280,3116 5340,3116 5400,3116 4800,3176 4860,3176 4920,3176 4980,3176 5040,3176 5100,3176 5160,3176 5220,3176 5280,3176 5340,3176 5400,3176 3640,3664 3700,3664 4780,3665 4840,3665 4900,3665 3640,3725 3700,3725 3760,3725 3820,3725 3880,3725 3940,3725 4000,3725 4060,3725 4120,3725 4180,3725 4240,3725 4300,3725 4360,3725 4420,3725 4480,3725 4540,3725 4600,3725 4660,3725 4720,3725 4780,3725 4840,3725 4900,3725 3640,3786 3700,3786 3760,3786 3820,3786 3880,3786 3940,3786 4000,3786 4060,3786 4120,3786 4180,3786 4240,3786 4300,3786 4360,3786 4420,3786 4480,3786 4540,3786 4600,3786 4660,3786 4720,3786 4780,3786 4840,3786 4900,3786 3640,3846 3700,3846 3760,3846 3820,3846 3880,3846 3940,3846 4000,3846 4420,3846 4480,3846 4540,3846 4600,3846 4660,3846 4720,3846 4780,3846 4840,3846 4900,3846 4060,3847 4120,3847 4180,3847 4240,3847 4300,3847 4360,3847 3640,3906 3700,3906 3760,3907 3820,3907 3880,3907 3940,3907 4000,3907
  other v2: 960,120 1065,120 1835,120 1940,120 2710,120 2815,120 3585,120 3690,120 4460,120 4565,120 255,130 1130,130 2005,130 2880,130 3755,130 960,225 1065,225 1835,225 1940,225 2710,225 2815,225 3585,225 3690,225 4460,225 4565,225 255,235 360,235 1130,235 1235,235 2005,235 2110,235 2880,235 2985,235 3755,235 3860,235 255,340 360,340 1130,340 1235,340 2005,340 2110,340 2880,340 2985,340 3755,340 3860,340 255,445 1130,445 2005,445 2880,445 3755,445 1065,540 1940,540 2815,540 3690,540 4565,540 255,550 1130,550 2005,550 2880,550 3755,550 255,645 1065,645 1130,645 1940,645 2005,645 2815,645 2880,645 3690,645 3755,645 4565,645 255,750 1065,750 1130,750 1940,750 2005,750 2815,750 2880,750 3690,750 3755,750 4565,750 255,855 1065,855 1130,855 1940,855 2005,855 2815,855 2880,855 3690,855 3755,855 4565,855 255,960 1065,960 1130,960 1940,960 2005,960 2815,960 2880,960 3690,960 3755,960 4565,960 255,1065 360,1065 960,1065 1065,1065 1130,1065 1235,1065 1835,1065 1940,1065 2005,1065 2110,1065 2710,1065 2815,1065 2880,1065 2985,1065 3585,1065 3690,1065 3755,1065 3860,1065 4460,1065 4565,1065 255,1170 360,1170 960,1170 1065,1170 1130,1170 1235,1170 1835,1170 1940,1170 2005,1170 2110,1170 2710,1170 2815,1170 2880,1170 2985,1170 3585,1170 3690,1170 3755,1170 3860,1170 4460,1170 4565,1170 255,1275 360,1275 960,1275 1065,1275 1130,1275 1235,1275 1835,1275 1940,1275 2005,1275 2110,1275 2710,1275 2815,1275 2880,1275 2985,1275 3585,1275 3690,1275 3755,1275 3860,1275 4460,1275 4565,1275 5127.57,1326.31 4804,2149 2298.9,2220 1310,2945 2304.5,3259.19 2374.5,3259.19 2444.5,3259.19 2514.5,3259.19 2584.5,3259.19 2704.5,3259.19 2774.5,3259.19 2844.5,3259.19 2914.5,3259.19 2984.5,3259.19 1505,3260 1575,3260 1645,3260 1715,3260 1785,3260 1898.5,3259.61 1968.5,3259.61 2038.5,3259.61 2108.5,3259.61 2178.5,3259.61 2304.5,3324.19 2374.5,3324.19 2444.5,3324.19 2514.5,3324.19 2584.5,3324.19 2704.5,3324.19 2774.5,3324.19 2844.5,3324.19 2914.5,3324.19 2984.5,3324.19 1505,3325 1575,3325 1645,3325 1715,3325 1785,3325 1898.5,3324.61 1968.5,3324.61 2038.5,3324.61 2108.5,3324.61 2178.5,3324.61 2304.5,3389.19 2374.5,3389.19 2444.5,3389.19 2514.5,3389.19 2584.5,3389.19 2704.5,3389.19 2774.5,3389.19 2844.5,3389.19 2914.5,3389.19 2984.5,3389.19 1505,3390 1575,3390 1645,3390 1715,3390 1785,3390 1898.5,3389.61 1968.5,3389.61 2038.5,3389.61 2108.5,3389.61 2178.5,3389.61 2304.5,3454.19 2374.5,3454.19 2444.5,3454.19 2514.5,3454.19 2584.5,3454.19 2704.5,3454.19 2774.5,3454.19 2844.5,3454.19 2914.5,3454.19 2984.5,3454.19 1505,3455 1575,3455 1645,3455 1715,3455 1785,3455 1898.5,3454.61 1968.5,3454.61 2038.5,3454.61 2108.5,3454.61 2178.5,3454.61 415,3500 485,3500 555,3500 625,3500 695,3500 855,3500 925,3500 995,3500 1065,3500 1135,3500 2304.5,3524.19 2374.5,3524.19 2444.5,3524.19 2514.5,3524.19 2704.5,3524.19 2774.5,3524.19 2844.5,3524.19 2914.5,3524.19 1505,3525 1575,3525 1645,3525 1715,3525 1898.5,3524.61 1968.5,3524.61 2038.5,3524.61 2108.5,3524.61 415,3565 485,3565 555,3565 625,3565 695,3565 855,3565 925,3565 995,3565 1065,3565 1135,3565 415,3635 485,3635 555,3635 625,3635 695,3635 855,3635 925,3635 995,3635 1065,3635 1135,3635 415,3700 485,3700 555,3700 625,3700 695,3700 855,3700 925,3700 995,3700 1065,3700 1135,3700 415,3770 485,3770 555,3770 625,3770 695,3770 855,3770 925,3770 995,3770 1065,3770 1135,3770 532,4084 965,4085
  other v3: 568.39,761.69 611.69,761.69 655,761.69 698.31,761.69 741.61,761.69 1443.39,761.69 1486.69,761.69 1530,761.69 1573.31,761.69 1616.61,761.69 2318.39,761.69 2361.69,761.69 2405,761.69 2448.31,761.69 2491.61,761.69 3193.39,761.69 3236.69,761.69 3280,761.69 3323.31,761.69 3366.61,761.69 4068.39,761.69 4111.69,761.69 4155,761.69 4198.31,761.69 4241.61,761.69 568.39,805 611.69,805 655,805 698.31,805 741.61,805 1443.39,805 1486.69,805 1530,805 1573.31,805 1616.61,805 2318.39,805 2361.69,805 2405,805 2448.31,805 2491.61,805 3193.39,805 3236.69,805 3280,805 3323.31,805 3366.61,805 4068.39,805 4111.69,805 4155,805 4198.31,805 4241.61,805 568.39,848.31 611.69,848.31 655,848.31 698.31,848.31 741.61,848.31 1443.39,848.31 1486.69,848.31 1530,848.31 1573.31,848.31 1616.61,848.31 2318.39,848.31 2361.69,848.31 2405,848.31 2448.31,848.31 2491.61,848.31 3193.39,848.31 3236.69,848.31 3280,848.31 3323.31,848.31 3366.61,848.31 4068.39,848.31 4111.69,848.31 4155,848.31 4198.31,848.31 4241.61,848.31
  other v5: 5213,1486 5278,1486
  other v6: 5020.2,1374.94 5059.57,1374.94 5098.94,1374.94 5020.2,1414.31 5059.57,1414.31 5098.94,1414.31 5020.2,1453.68 5059.57,1453.68 5098.94,1453.68
GPIO0_EXP: EXP0.7 U3.140 | length 3157.7
  Top Layer w8: U3.140@2364.25,2495.75 2575.61,2495.75 2671.36,2400 2698.24,2400 2731.74,2366.5 2870.8,2366.5 2904.3,2400 3187.57,2400 3227.57,2360 3390.98,2360 3480.98,2270 4495.77,2270 4710,2484.23 4710,2608.93 4746.07,2645 5045,2645 EXP0.7@5135,2735
GPIO1_EXP: EXP0.8 U3.139 | length 3211.9
  Top Layer w8: U3.139@2364.25,2476.06 2574.08,2476.06 2665.15,2385 2692.02,2385 2725.52,2351.5 2877.01,2351.5 2910.51,2385 3181.36,2385 3221.36,2345 3384.77,2345 3474.77,2255 4501.98,2255 4725,2478.02 4725,2602.72 4752.28,2630 5080,2630 EXP0.8@5185,2735
GPIO2_EXP: EXP0.14 U3.21 | length 4244.2
  Top Layer w8: U3.21@1899.69,2645.35 1899.69,2877.41 2007.28,2985 2461.07,2985 2555,2891.07 2555,2688.79 2677.29,2566.5 3439.27,2566.5 3497.19,2508.58 3497.19,2508.35 3555.54,2450 4421.21,2450 4530,2558.79 4530,2808.79 4660.21,2939 5031,2939 EXP0.14@5135,2835
GPIO3_EXP: EXP0.13 U3.22 | length 4327.2
  Top Layer w8: U3.22@1880,2645.35 1880,2878.93 2001.07,3000 2467.28,3000 2570,2897.28 2570,2695 2683.5,2581.5 3445.48,2581.5 3512.19,2514.8 3512.19,2514.57 3561.76,2465 4415,2465 4515,2565 4515,2815 4654,2954 5066,2954 EXP0.13@5185,2835
GPIO4_EXP: EXP2.5 U3.59 | length 1989.9
  Top Layer w8: EXP2.5@360,1480 360,1511.11 320.11,1551 147.99,1551 131,1567.99 131,1681 195,1745 759.45,1745 793.2,1778.75 896.47,1778.75 1017.72,1900 v1(1055,1900) ; v1(1440,2141.42) U3.59@1533.54,2141.42
  Bottom Layer w8: v1(1055,1900) 1073.79,1900 1138.79,1965 1263.58,1965 v1(1440,2141.42)
GPIO5_EXP: EXP2.16 U3.68 | length 1346.3
  Top Layer w8: EXP2.16@360,1580 360,1603.23 426.77,1670 851.36,1670 1026.36,1845 1121.36,1845 1176.36,1900 1346.36,1900 1386.36,1940 1410,1940 1434.25,1964.25 U3.68@1533.54,1964.25